# Altium PCB CATZILLA.PcbDoc (part 2 of 3)
Units mm, origin at the board's own origin, x right, y up, seen from the top; angles counter-clockwise.
Board outline 100 x 100 mm, 2 copper layers (Top Layer, Bottom Layer), stack 1.57 mm thick; 150 components, 108 nets, 585 pads, 1555 vias.
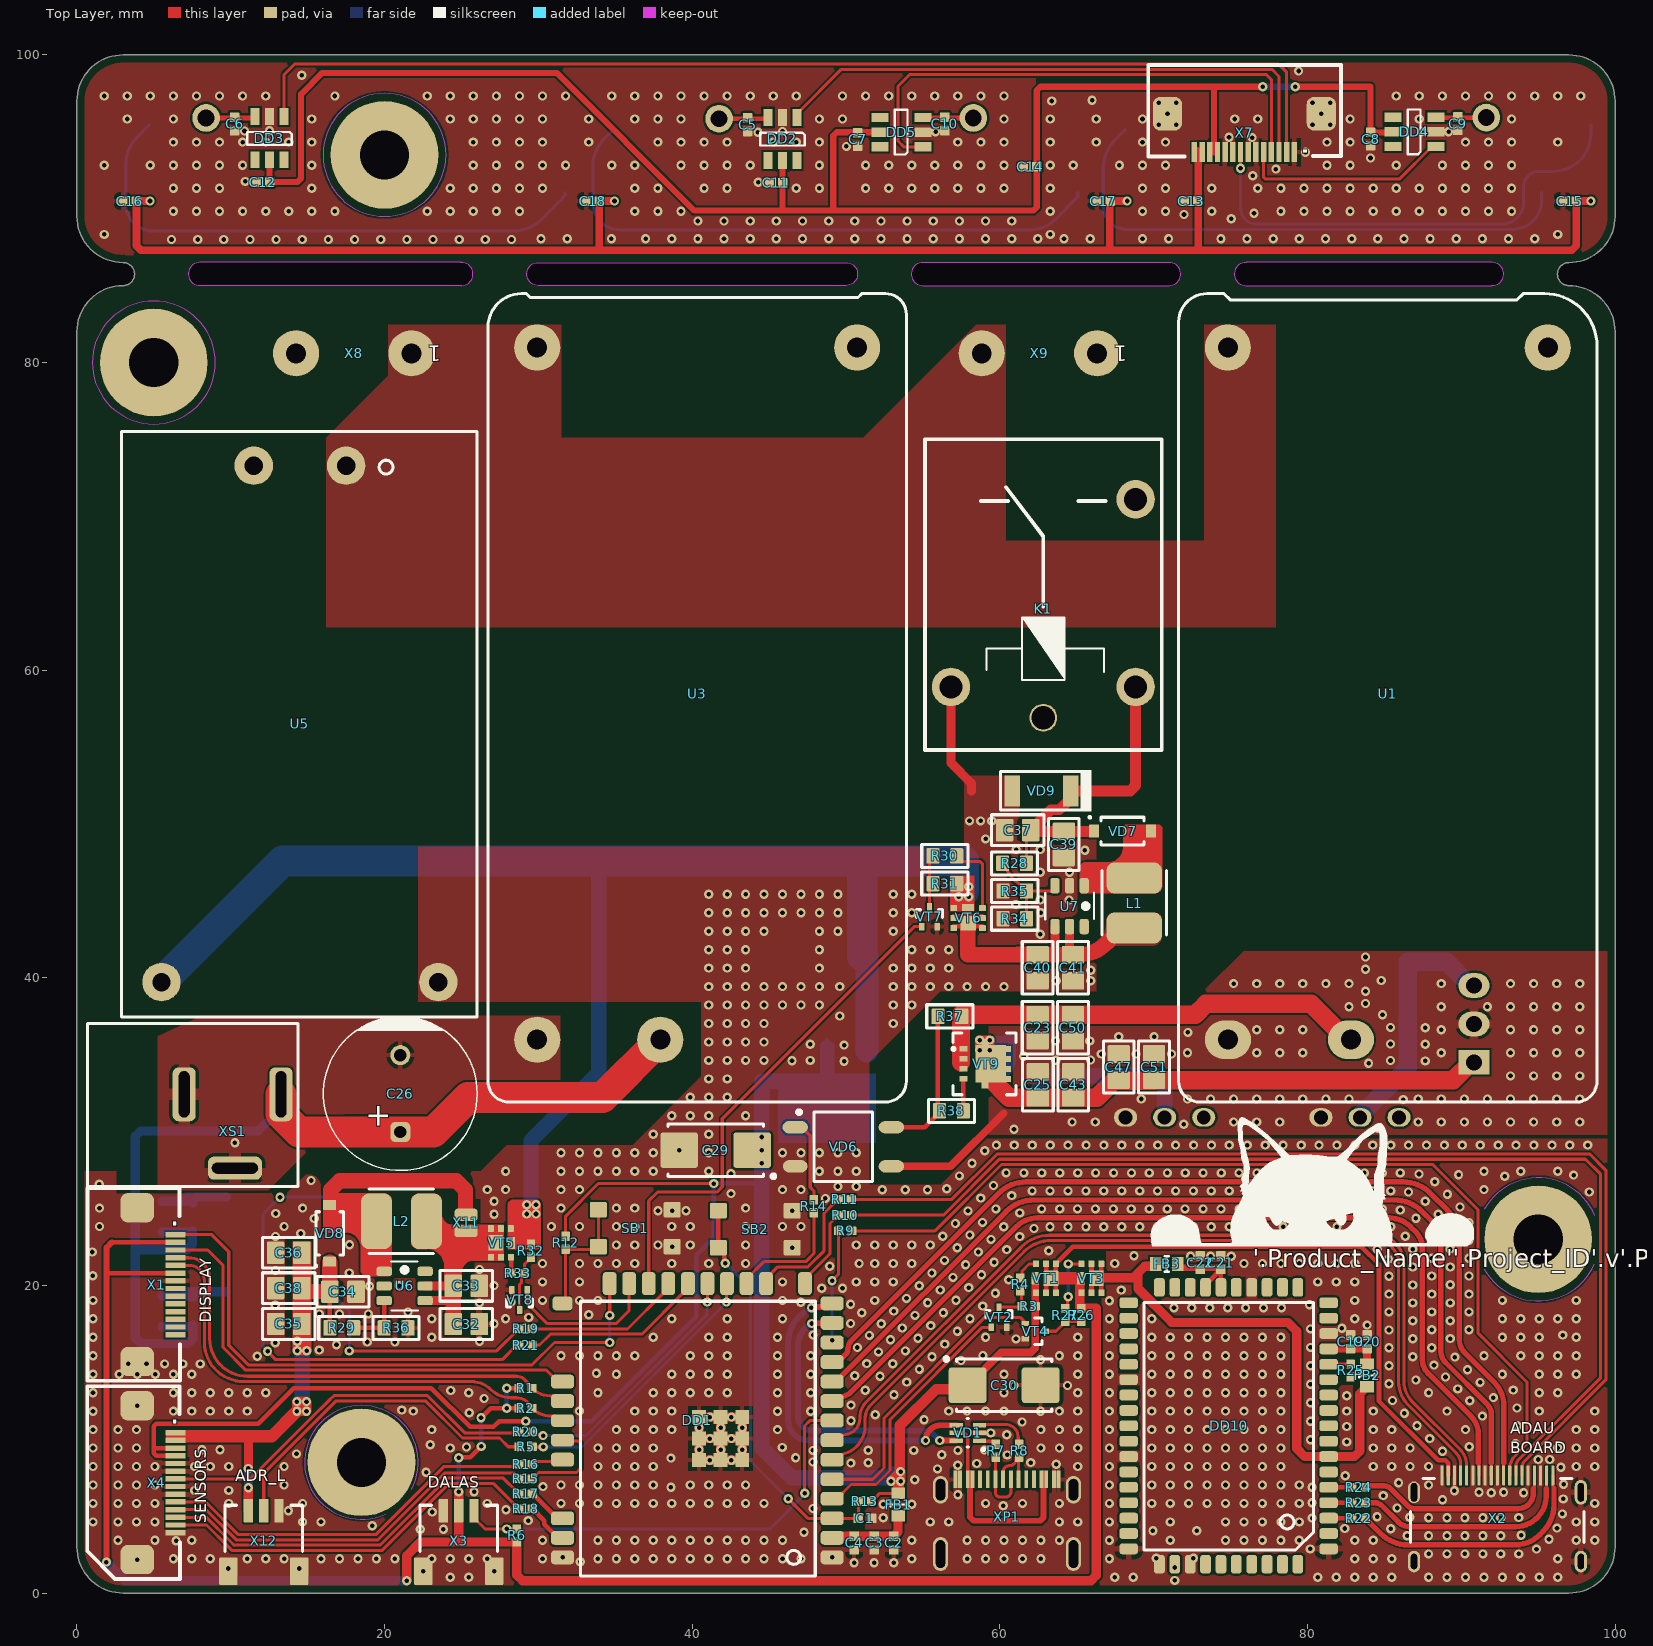
[diagram p0: Top Layer view]

## Via types
v1: diameter 0.6, hole 0.3, Top Layer to Bottom Layer, tented both sides, 1554 vias
v2: diameter 0.7/0.8 (per signal layer), hole 0.3, Top Layer to Bottom Layer, tented both sides, 1 vias

## Nets (pads, with @x,y where several pads share a name; then routed paths per layer and width w, separated by ;. In a path a pad name is that pad's centre, name@x,y a point inside that pad or via, vN(x,y) a via of type N, cw(c..) or ccw(c..) an arc to the next point about the centre after c; other vN are vias at no path point) (continued)
ADDR_L_F: DD6.4 X7.8 | length 31.4
  Top Layer w0.2: v1(75.65,92.625) X7.8@75.65,93.675
  Bottom Layer w0.2: v1(75.65,92.625) 75.65,90.025 ccw(c76.675,90.025) 76.675,89 92.649,89 ccw(c92.649,90.401) 94.05,90.401 94.05,91.425 cw(c95.05,91.425) 94.099,91.735 cw(c95.05,91.425) 94.74,92.376 cw(c95.05,91.425) 95.05,92.425 95.975,92.425 ccw(c95.975,94.875) 97.426,92.901 ccw(c95.975,94.875) 97.949,93.424 ccw(c95.975,94.875) 98.425,94.875 DD6.4@98.425,95.45
ADDR_L_FRONT: DD1.20 R20.2 | length 16.8
  Top Layer w0.2: R20.2@29.6,10.49 29.771,10.319 30.233,10.319 v1(30.309,10.243) ; v1(40.975,18.925) 40.985,18.935 40.985,20.113 DD1.20@40.994,20.123
  Bottom Layer w0.2: v1(30.309,10.243) 33.098,10.243 40.975,18.12 v1(40.975,18.925)
ADDR_LED: DD1.19 R5.1 | length 17.7
  Top Layer w0.2: R5.1@29.6,9.515 29.606,9.509 30.318,9.509 v1(30.324,9.503) ; v1@42.225,18.95 42.245,18.97 42.245,20.103 DD1.19@42.264,20.123
  Bottom Layer w0.2: v1(30.324,9.503) 32.839,9.503 42.225,18.889 v1(42.225,18.925)
BLE_BCLK: R24.2 X2.4 | length 13.2
  Top Layer w0.2: 94.75,6.838 94.75,7.071 X2.4@94.75,7.65
  Top Layer w0.35: R24.2@83.75,6.875 83.844,6.969 84.953,6.969 cw(c84.953,6.303) 85.424,6.774 86.531,5.666 ccw(c86.956,6.091) 86.956,5.491 93.685,5.491 ccw(c93.685,6.484) 94.678,6.484 94.678,6.789
BLE_LRCLK: R23.2 X2.2 | length 14.8
  Top Layer w0.2: 95.55,6.839 95.55,7.071 X2.2@95.55,7.65
  Top Layer w0.35: R23.2@83.75,5.875 84.349,5.875 cw(c84.349,5.149) 84.863,5.663 85.913,4.612 85.914,4.611 ccw(c86.617,5.313) 86.617,4.319 86.619,4.319 89.175,4.319 93.525,4.319 ccw(c93.525,6.32) 95.525,6.32 95.525,6.804
BLE_SDATA: R22.2 X2.1 | length 16.3
  Top Layer w0.2: 95.95,6.839 95.95,7.071 X2.1@95.95,7.65
  Top Layer w0.35: R22.2@83.75,4.875 84.741,3.884 ccw(c86.537,5.68) 86.537,3.14 93.515,3.14 ccw(c93.519,5.422) 95.322,4.023 cw(c95.597,3.807) 95.345,4.05 95.346,4.051 ccw(c93.618,5.729) 96.027,5.729 96.027,6.819
cADAU_RES: R10.1 X2.7 | length 72.4
  Top Layer w0.2: R10.1@50.376,24.575 56.34,24.575 59.97,28.205 98.08,28.205 99.06,27.225 99.06,14.002 93.709,8.65 ccw(c93.95,8.411) 93.63,8.525 93.562,8.335 ccw(c93.75,8.267) 93.55,8.267 X2.7@93.55,7.65
cBLE_EN: DD1.5 VT4.1 | length 19
  Top Layer w0.2: DD1.5@49.1,7.403 51.739,7.403 52.475,8.139 52.475,11.369 59.031,17.925 61.325,17.925 VT4.1@61.725,17.525
cBOOT: DD1.27 R12.2 SB1.1 | length 8.2
  Top Layer w0.2: DD1.27@31.575,18.833 31.775,19.033 R12.2@31.775,22.35 32.375,22.35 32.388,22.337 33.714,22.337 SB1.1@33.9,22.523 SB1.1@33.9,24.923
cEN_ADDR_LED: DD1.24 VT8.1 | length 10.2
  Top Layer w0.2: VT8.1@29.28,19.71 29.28,18.823 30.587,17.515 35.05,17.515 35.905,18.37 DD1.24@35.905,20.123
cEN_ALL_POWER: DD1.23 VT7.1 | length 33.1
  Top Layer w0.2: DD1.23@37.175,20.123 37.175,25.5 37.757,26.082 41.621,26.082 41.956,26.418 41.956,30.843 54.438,43.325 VT7.1@54.925,43.325
cEN_POW_ADAU: R14.2 VD6.1 | length 5
  Top Layer w0.2: VD6.1@47.188,30.286 47.188,30.224 47.675,29.736 47.675,26.375 47.913,26.137 R14.2@47.913,25.575
cLINE_SW: R11.1 X2.6 | length 72.8
  Top Layer w0.2: R11.1@50.344,25.6 56.884,25.6 59.83,28.545 98.355,28.545 99.4,27.5 99.4,13.861 94.095,8.555 ccw(c94.444,8.206) 93.95,8.206 X2.6@93.95,7.65
cMCU_RES: C1.2 DD1.3 R13.2 SB2.1 | length 26.8
  Top Layer w0.2: v1(46.243,6.142) 47.522,4.863 DD1.3@49.1,4.863 49.102,4.861 50.79,4.861 C1.2@50.792,4.859 50.799,4.866 50.799,5.968 R13.2@50.807,5.975
  Top Layer w0.282: SB2.1@41.7,24.861 SB2.1@41.7,22.461 41.733,22.461 42.092,22.102 42.092,21.508 v1(42.15,21.45)
  Bottom Layer w0.2: v1(42.15,21.45) 43.79,19.81 43.79,8.594 v1(46.243,6.142)
cPWM_FAN1: DD1.22 R19.1 | length 9.6
  Top Layer w0.2: R19.1@29.592,17.175 35.797,17.175 DD1.22@38.224,19.601
cPWM_FAN2: DD1.21 R21.1 | length 11.4
  Top Layer w0.2: R21.1@29.592,16.125 30.075,16.125 30.785,16.835 36.736,16.835 39.495,19.594 DD1.21@39.531,19.594
cVSYS_EN: DD1.4 VT2.1 | length 16.9
  Top Layer w0.2: DD1.4@49.1,6.133 49.4,6.133 50.33,7.063 51.947,7.063 52.856,7.971 52.856,11.269 58.861,17.275 VT2.1@59.45,17.275
DALAS: DD1.8 R6.1 X3.3 | length 30.2
  Top Layer w0.2: X3.3@25.822,5.357 25.822,4.882 26.529,4.175 R6.1@28.6,4.175 ; v1(47.324,6.491) 47.3,6.515 47.3,10.86 47.653,11.213 DD1.8@49.1,11.213
  Bottom Layer w0.2: v1(27.95,4.175) 45.075,4.175 47.324,6.424 v1(47.324,6.491)
ESP32_BCLK: DD1.10 X2.11 | length 62.2
  Top Layer w0.2: X2.11@91.95,7.65 X2.11@91.95,8.229 ; X2.11@91.95,8.229 91.95,8.462
  Top Layer w0.35: DD1.10@49.1,13.753 49.373,13.753 49.675,14.055 49.675,14.071 60.42,24.816 cw(c62.216,23.02) 62.216,25.56 85.645,25.56 cw(c85.645,23.02) 87.441,24.816 88.116,24.141 cw(c86.766,22.791) 88.675,22.791 88.675,15.69 ccw(c89.64,15.69) 88.958,15.008 91.67,12.295 cw(c90.974,11.599) 91.958,11.599 91.958,9.825 ; 91.957,8.456 91.957,9.825
ESP32_DIN: DD1.11 X2.9 | length 64.1
  Top Layer w0.2: X2.9@92.75,7.65 X2.9@92.75,8.229 ; X2.9@92.75,8.229 92.75,8.462
  Top Layer w0.35: DD1.11@49.1,15.023 ccw(c49.1,15.938) 49.747,15.291 49.99,15.534 ccw(c49.662,15.861) 50.125,15.861 cw(c50.923,15.861) 50.359,16.425 59.925,25.991 cw(c61.721,24.195) 61.721,26.735 86.205,26.735 cw(c86.205,24.195) 88.001,25.991 89.131,24.861 cw(c87.335,23.065) 89.875,23.065 89.875,16.488 ccw(c91.113,16.488) 90.237,15.613 92.119,13.731 92.121,13.729 cw(c90.558,12.167) 92.768,12.168 92.768,12.166 92.768,8.456
ESP32_LRCLK: DD1.9 X2.13 | length 59.9
  Top Layer w0.2: X2.13@91.15,7.65 91.15,8.456
  Top Layer w0.35: DD1.9@49.481,12.741 ccw(c49.481,13.987) 50.362,13.106 61.076,23.82 cw(c62.467,22.429) 62.467,24.396 85.304,24.396 cw(c85.304,22.404) 86.712,23.812 87.046,23.479 cw(c86.017,22.45) 87.472,22.45 87.472,15.166 ccw(c88.691,15.166) 87.829,14.304 90.617,11.517 cw(c89.423,10.323) 91.111,10.323 91.111,8.456
GND: C23.2 C24.2 C25.2 C42.1 C43.2 C47.2 C48.2 C49.1 C50.2 C51.2 U1.3 U2.1 U2.6 VD6.3 XP3.2 | length 12.5
  Top Layer w0.2: 56.971,27.746 59.623,30.398
  Top Layer w0.5: VD6.3@52.95,27.746 56.796,27.746 60.25,31.2
  other v1: 60.925,30.15 84.575,30.225 71.95,30.475 64.7,30.625 66.2,30.625 75.2,30.625 76.7,30.625 78.2,30.625 87.2,30.625 88.7,30.625 90.2,30.625 91.7,30.625 93.2,30.625 94.7,30.625 96.2,30.625 97.7,30.625 86.221,32.085 69.2,32.125 72.2,32.125 73.7,32.125 75.2,32.125 76.7,32.125 78.2,32.125 79.7,32.125 81.2,32.125 82.7,32.125 87.2,32.125 88.7,32.125 90.2,32.125 91.7,32.125 93.2,32.125 94.7,32.125 96.2,32.125 97.7,32.125 93.2,33.625 94.7,33.625 96.2,33.625 97.7,33.625 83.975,34.45 87.65,34.6 63.633,34.634 85.4,34.625 65.896,34.657 61.55,34.9 66.596,35.049 68.858,35.049 71.158,35.049 72.2,35.125 76.7,35.125 78.2,35.125 79.7,35.125 88.7,35.125 93.2,35.125 94.7,35.125 96.2,35.125 97.7,35.125 87.65,35.675 85.4,35.7 63.625,35.9 65.85,35.9 67.727,36.18 70.027,36.18 72.225,36.45 76.7,36.625 78.2,36.625 79.7,36.625 88.7,36.625 93.2,36.625 94.7,36.625 96.2,36.625 97.7,36.625 87.65,36.75 85.4,36.775 84.875,37.6 82.7,38.125 88.7,38.125 91.7,38.125 93.2,38.125 94.7,38.125 96.2,38.125 97.7,38.125 83.775,38.332 83.775,39.125 75.2,39.625 76.7,39.625 78.2,39.625 79.7,39.625 81.2,39.625 82.7,39.625 88.7,39.625 93.2,39.625 94.7,39.625 96.2,39.625 97.7,39.625 84.8,39.825 83.775,40.557 83.775,41.35

## Text inside footprints (layer, text, board x,y; h text height)
C26: Top Overlay "+" at 20.251,30.168 h1.5 r90; Top Assembly "+" at 20.525,29 h3 r90
C27: Bottom Assembly "+" at 51.58,42.7 h0.3; Bottom Assembly "C" at 48.98,40.9 h0.9
C29: Top Assembly "+" at 44.425,27.497 h0.3 r180; Top Assembly "C" at 41.825,29.297 h0.9 r180
C30: Top Assembly "C" at 59.975,13.018 h0.9; Top Assembly "+" at 57.375,14.818 h0.3
K1: Top Assembly "NO" at 65.733,72.708 h0.8 r270; Top Assembly "COM" at 65.533,57.708 h0.8 r270; Top Assembly "NC" at 59.133,72.708 h0.8 r270
U1: Top Assembly "AC/L" at 96.075,74.975 h1 r90; Top Assembly "AC/N" at 75.375,74.875 h1 r90; Top Assembly "-V" at 75.175,41.025 h1 r90; Top Assembly "+V" at 83.475,41.025 h1 r90
U3: Top Assembly "AC/L" at 51.175,74.975 h1 r90; Top Assembly "AC/N" at 30.475,74.875 h1 r90; Top Assembly "-V" at 30.275,41.025 h1 r90; Top Assembly "+V" at 38.575,41.025 h1 r90
X8: Top Overlay "1" at 23.699,81.075 h1 r180; Top Assembly "1" at 23.699,81.075 h1 r180
X9: Top Overlay "1" at 68.274,81.075 h1 r180; Top Assembly "1" at 68.274,81.075 h1 r180